# Allegro board IoT Moudle V1_0_3.brd
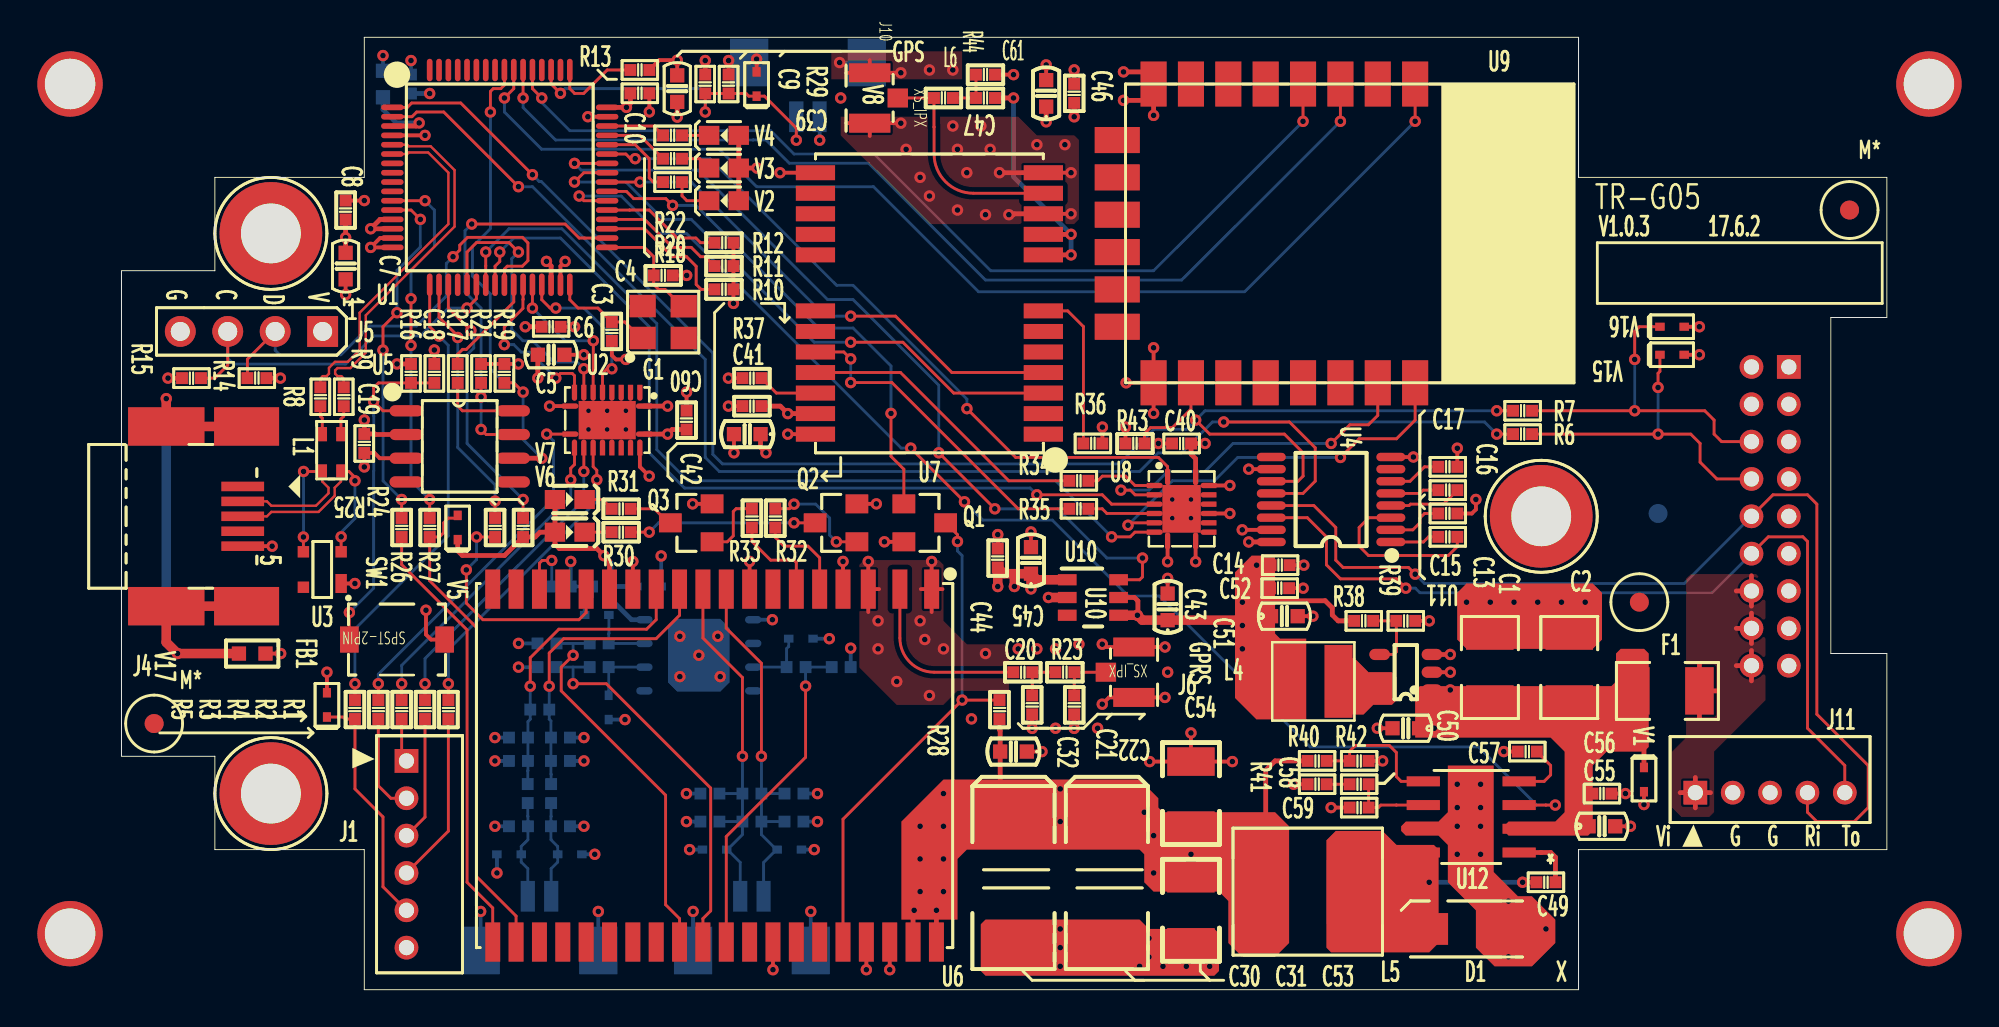
[diagram p0: board, top side]
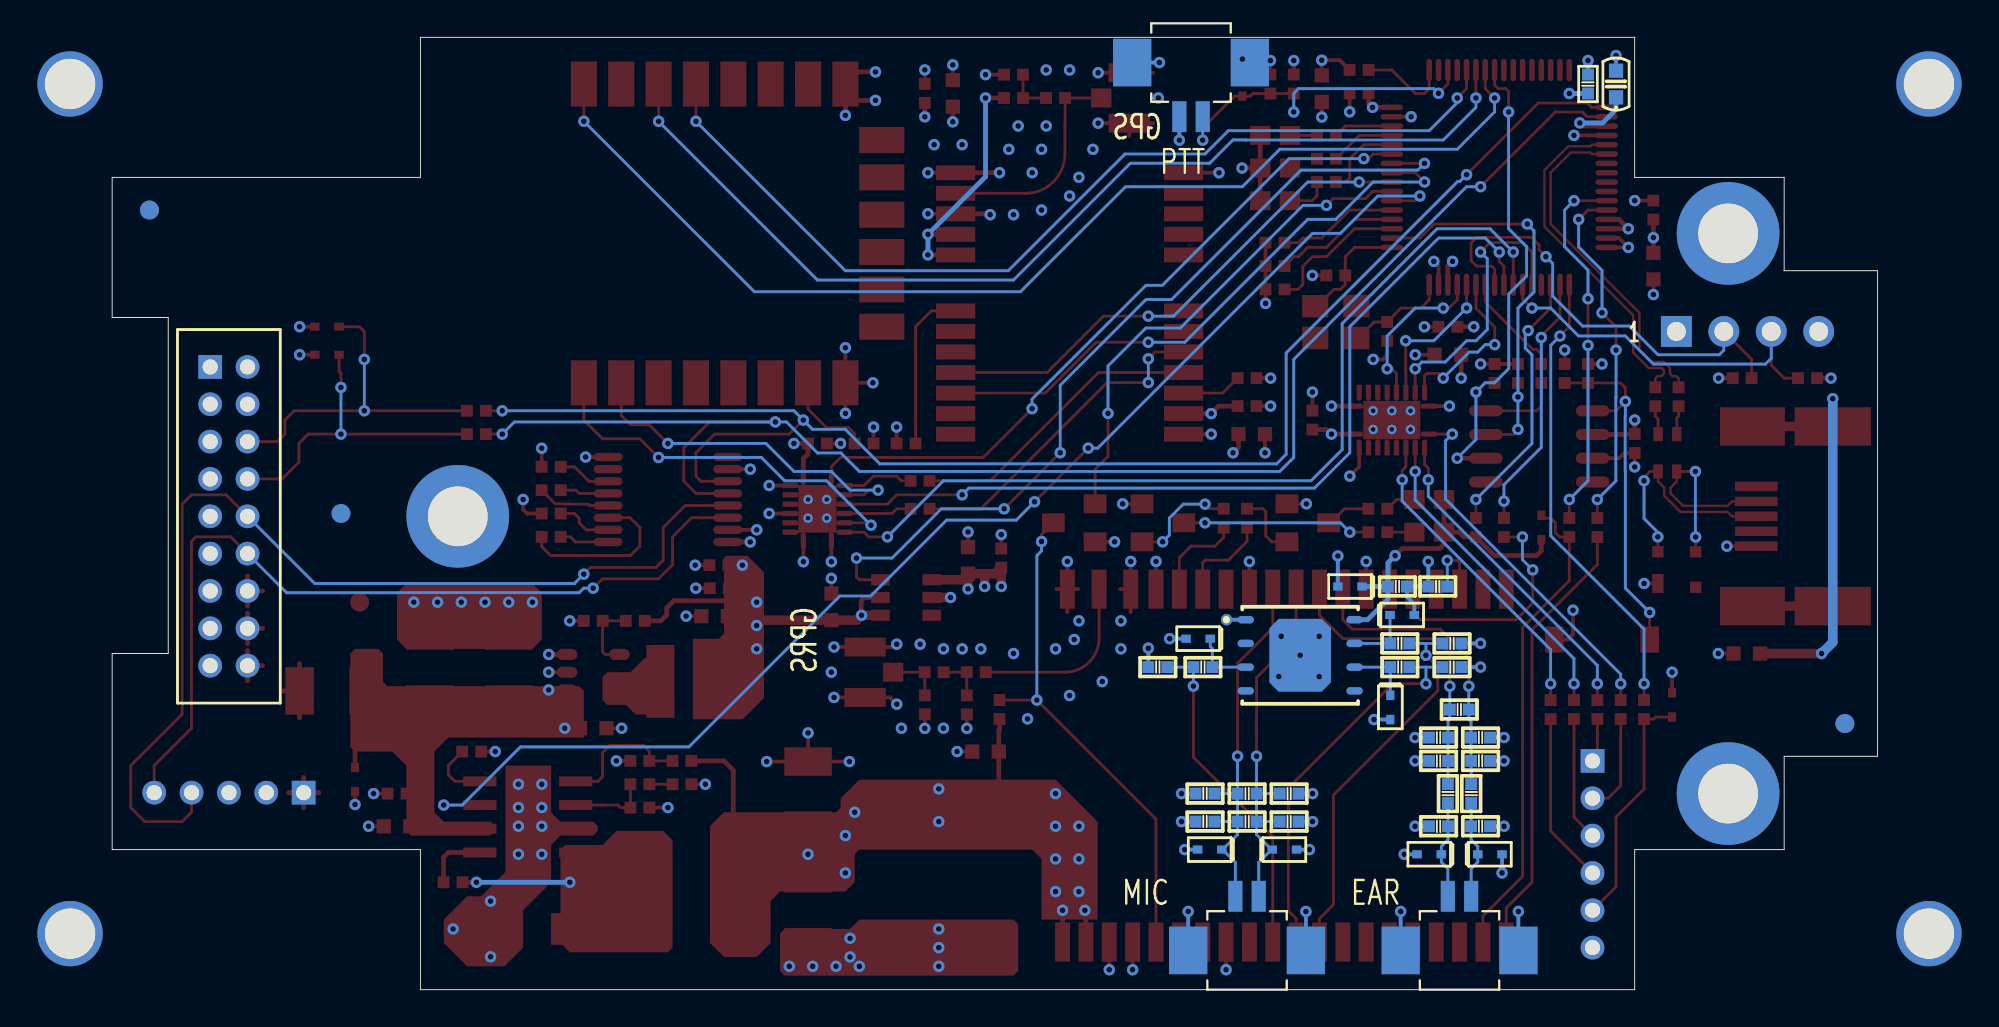
[diagram p1: board, bottom side, seen from below]

Outline 94.5 x 51 mm; copper layers: TOP, GND, VCC, BOTTOM. Coordinates in mm from the lower left corner of the outline.
Outline path: 0,38.5 0,12.5 5,12.5 5,7.5 13,7.5 13,0 78,0 78,7.5 94.5,7.5 94.5,18 91.5,18 91.5,36 94.5,36 94.5,43.5 78,43.5 78,51 13,51 13,43.5 5,43.5 5,38.5 0,38.5

## Design rules (mm)
constraint set DEFAULT: min track width 0.152
net group GPS_RXD: nets GPS_RXD N21119
net group GPS_TXD: nets GPS_TXD N21123
net group GSM_RESETB: nets GSM_RESETB N09232
net group HOST_TXD: nets HOST_TXD UART1_RX
net group J_LED1: nets J_LED1 R_LED1
net group J_LED2: nets J_LED2 R_LED2
net group J_LED3: nets J_LED3 R_LED3
net group J_LED4: nets J_LED4 R_LED4
net group J_PWR_OFF: nets J_PWR_OFF PWR_OFF
net group LED5: nets LED5 N16763366
net group LED6: nets LED6 N33466
net group LED7: nets LED7 N33798
net group MIC_N: nets MIC_N MIC_P
net group N06381: nets N06381 N06389
net group N06450: nets N06450 N06464
net group N18758: nets N18758 N18894
net group N18762: nets N18762 N18890
net group N56569: nets N56569 N56581
net group N57275: nets N57275 N57283
net group NET_LIGHT: nets N18359 NET_LIGHT
net group PWR_STATUS: nets N18352 PWR_STATUS
net group UART1_TX: nets HOST_RXD UART1_TX
net group UART2_RX: nets N09470 UART2_RX
net group UART2_TX: nets N09480 UART2_TX
net group USB_DM: nets N36326 USB_DM
net group USB_DP: nets N36338 USB_DP
net group USB_IN: nets N37457 N37463
net group WDO_B: nets N24334 WDO_B
net group EAR_N: nets EAR_N EAR_P N14884 N14898
net group N10748: nets N10748 N10820 N10896
nets with their own width: min track width 0.152; nets WD_IN
nets with their own width: min track width 0.203; nets GND
nets with their own width: min track width 0.254; nets VCC_2V8 VCC_3V3 VCC_4V VCC_5V VCC_IN

## Placement (name value [footprint] x y rotation side)
C1  476  [C1210]  73.25 17.25 90 top
C2  476  [C1210]  77.5 17.25 90 top
C3  220  [C0402]  26.25 35.25 270 top
C4  220  [C0402]  29 38.25 0 top
C5  106  [C0603]  23 34 0 top
C6  104  [C0402]  23 35.5 0 top
C7  106  [C0603]  12 38.75 270 top
C8  104  [C0402]  12 41.75 90 top
C9  106  [C0603]  29.75 48.25 90 top
C10  104  [C0402]  27.75 48 0 top
C11  106  [C0603]  14 48.5 90 bottom
C12  104  [C0402]  15.5 48.5 90 bottom
C13  104  [C0402]  71 24.25 180 top
C14  104  [C0402]  62.02 22.73 0 top
C15  104  [C0402]  71 25.5 0 top
C16  104  [C0402]  71 26.75 0 top
C17  104  [C0402]  71 28 0 top
C18  104  [C0402]  16.75 33 270 top
C19  104  [C0402]  13 29.25 270 top
C20  270  [C0402]  48.25 17 180 top
C21  270  [C0402]  48.75 15.25 270 top
C22  270  [C0402]  51 15.25 270 top
C23  120  [C0402]  31.5 10.5 0 bottom
C24  120  [C0402]  36 10.5 180 bottom
C25  330  [C0402]  31.5 9 0 bottom
C26  330  [C0402]  36 9 180 bottom
C27  120  [C0402]  33.75 10.5 0 bottom
C28  330  [C0402]  33.75 9 0 bottom
C29  120  [C0402]  22.39 15 0 bottom
C30  477  [CT7343]  47.75 6 270 top
C31  477  [CT7343]  52.75 6 270 top
C32  105  [C0603]  47.75 12.75 180 top
C33  330  [C0402]  21.25 13.5 180 bottom
C34  330  [C0402]  23.5 13.5 0 bottom
C35  120  [C0402]  23.5 12.25 0 bottom
C36  120  [C0402]  21.25 12.25 180 bottom
C37  330  [C0402]  23.5 8.75 0 bottom
C38  330  [C0402]  21.25 8.75 180 bottom
C39  104  [C0402]  32.5 48.5 90 top
C40  104  [C0402]  56.75 29.25 180 top
C41  104  [C0402]  33.75 31.25 180 top
C42  106  [C0603]  33.5 29.75 180 top
C43  105  [C0603]  56 20.5 90 top
C44  105  [C0603]  48.69 22.99 90 top
C45  103  [C0402]  46.91 23.11 90 top
C46  104  [C0402]  51 48 90 top
C47  106  [C0603]  49.5 48 90 top
C49  104  [C0402]  76.25 5.75 180 top
C50  106  [C0603]  68.75 14 180 top
C51  106  [C0603]  62.25 20 0 top
C52  104  [C0402]  62 21.5 0 top
C53  476  [C1210]  57.25 4.25 270 top
C54  476  [C1210]  57.25 10.5 90 top
C55  106  [C0603]  79.25 8.75 0 top
C56  104  [C0402]  79.25 10.5 0 top
C57  104  [C0402]  75.25 12.75 180 top
C58  472  [C0402]  66.25 11 180 top
C59  390  [C0402]  66.25 9.75 180 top
C60  104  [C0402]  30.25 30.5 90 top
C61  104  [C0402]  46.25 49 0 top
C62  104  [C0402]  25.7 21.59 180 bottom
C63  220  [C0402]  38.53 17.27 180 bottom
C64  220  [C0402]  22.78 17.27 0 bottom
C65  220  [C0402]  22.78 18.54 0 bottom
D1  B340A  [SMA]  72 3.25 0 top
D22  ESD  [SOD-523]  28.24 21.59 0 bottom
D23  ESD  [SOD-523]  36.37 18.8 0 bottom
D24  ESD  [SOD-523]  26.08 15.11 270 bottom
D25  ESD  [SOD-523]  25.45 20.07 180 bottom
F1  SMD200  [F1210]  82.75 16 180 top
FB1  BLM18AG331SN1D  [L0603]  7 18 0 top
G1  8MHz  [OSC_3225]  29 35.75 0 top
J1  CON6  [CON1X6_2R0_HDR_SIP]  15.26 7.25 0 top
J3  CON2X9  [CON2X9-2R0-5R5X20]  89.25 33.35 180 bottom
J4  MINI_USB  [CONN_USB_MINI_B_SMD]  2.75 25.35 270 top
J5  CON4  [CON1X4_2R54-DIP]  10.77 35.25 180 top
J6  XS_IPX  [IPX]  54.2 17 180 top
J7  -  [53261-0271]  33.75 5 180 bottom
J8  -  [53261-0271]  22.38 5 180 bottom
J9  -  [53261-0271]  36.75 46.75 0 bottom
J10  XS_IPX  [IPX]  40.06 47.75 0 top
J11  CON5  [CON1X5_2R0_HDR_SIP]  88.25 10.55 90 top
L1  DLW21HN900SQ2L  [L0805_4PIN]  11.25 28.75 90 top
L2  6.8nH  [L0402]  23 10.5 270 bottom
L3  6.8nH  [L0402]  21.75 10.5 270 bottom
L4  2.2uH  [L3310]  63.8 16.51 180 top
L5  6.8uH  [L2525]  63.5 5.25 180 top
L6  27nH  [L0402]  44 47.75 0 top
NOREF  -  []  5 12.5 0 top
NOREF#2  -  []  78 0 0 top
NOREF#3  -  []  13 7.5 0 top
NOREF#4  -  [unnamed#2]  76 25.35 0 top
NOREF#5  -  []  91.5 18 0 top
NOREF#6  -  []  94.5 7.5 0 top
NOREF#7  -  []  94.5 36 0 top
NOREF#8  -  []  76 25.35 0 top
NOREF#9  -  []  5 38.5 0 top
NOREF#10  -  [unnamed#2]  92.5 41.75 0 top
NOREF#11  -  []  78 0 0 top
NOREF#12  -  []  13 43.5 0 top
NOREF#13  -  []  99.58 51 0 top
NOREF#14  -  []  -5.08 51 0 top
NOREF#15  -  []  8 10.5 0 top
NOREF#16  -  []  5 38.5 0 top
NOREF#17  -  []  13 7.5 0 top
NOREF#18  -  []  91.5 18 0 top
NOREF#19  -  []  13 43.5 0 top
NOREF#20  -  []  78 43.5 0 top
NOREF#21  -  [unnamed#2]  8 10.5 0 top
NOREF#22  -  []  8 40.5 0 top
NOREF#23  -  []  8 10.5 0 top
NOREF#24  -  [unnamed#2]  81.25 20.75 0 top
NOREF#25  -  []  -5.5 0 90 top
NOREF#26  -  []  94.5 36 0 top
NOREF#27  -  []  99.58 51 0 top
NOREF#28  -  [unnamed#2]  1.75 14.25 0 top
NOREF#29  -  [unnamed#2]  8 40.5 0 top
NOREF#30  -  []  94.5 7.5 0 top
NOREF#31  -  []  78 43.5 0 top
NOREF#32  -  []  5 12.5 0 top
NOREF#33  -  []  76 25.35 0 top
NOREF#34  -  []  -5.08 51 0 top
NOREF#35  -  []  8 40.5 0 top
NOREF#36  -  [unnamed#2]  92.5 41.75 180 bottom
NOREF#37  -  [unnamed#2]  96.75 3 180 bottom
NOREF#38  -  [unnamed#2]  1.75 14.25 180 bottom
NOREF#39  -  [unnamed#2]  -2.75 48.5 180 bottom
NOREF#40  -  [unnamed#2]  82.25 25.5 180 bottom
NOREF#41  -  [unnamed#2]  -2.75 3 180 bottom
NOREF#42  -  [unnamed#2]  96.75 48.5 180 bottom
Q1  DTC114TET1G  [SOT-23]  43 25 270 top
Q2  DTC114TET1G  [SOT-23]  38.25 25 90 top
Q3  DTC114TET1G  [SOT-23]  30.5 25 90 top
R1  102  [R0402]  17.5 15 270 top
R2  102  [R0402]  16.25 15 270 top
R3  102  [R0402]  13.75 15 270 top
R4  102  [R0402]  15 15 270 top
R5  102  [R0402]  12.5 15 90 top
R6  0  [R0402]  75 29.75 0 top
R7  101  [R0402]  75 31 0 top
R8  220  [R0402]  10.65 31.75 270 top
R9  220  [R0402]  11.9 31.75 270 top
R10  101  [R0402]  32.25 37.5 0 top
R11  101  [R0402]  32.25 38.75 0 top
R12  101  [R0402]  32.25 40 0 top
R13  101  [R0402]  27.75 49.25 0 top
R14  472  [R0402]  7.25 32.75 0 top
R15  472  [R0402]  3.75 32.75 180 top
R16  1002  [R0402]  15.5 33 270 top
R17  101  [R0402]  18 33 90 top
R18  102  [R0402]  29.5 43.25 180 top
R19  1002  [R0402]  20.5 33 90 top
R20  102  [R0402]  29.5 44.5 0 top
R21  1002  [R0402]  19.25 33 90 top
R22  102  [R0402]  29.5 45.75 0 top
R23  0  [R0402]  50.5 17 0 top
R24  102  [R0402]  21.5 24.75 270 top
R25  101  [R0402]  20 24.75 270 top
R26  101  [R0402]  15 24.75 270 top
R27  101  [R0402]  16.5 24.75 270 top
R28  102  [R0402]  47 15 270 top
R29  102  [R0402]  31.25 48.5 90 top
R30  102  [R0402]  26.75 24.5 180 top
R31  102  [R0402]  26.75 25.75 180 top
R32  102  [R0402]  35 25.25 270 top
R33  102  [R0402]  33.75 25.25 270 top
R34  0  [R0402]  51.25 27.25 0 top
R35  0  [R0402]  51.25 25.75 0 top
R36  0  [R0402]  52 29.25 0 top
R37  0  [R0402]  33.75 32.75 180 top
R38  5623  [R0402]  66.5 19.75 0 top
R39  1003  [R0402]  68.75 19.75 180 top
R40  1002  [R0402]  64 12.25 180 top
R41  4992  [R0402]  64 11 0 top
R42  2491  [R0402]  66.25 12.25 180 top
R43  1002  [R0402]  54.25 29.25 0 top
R44  100  [R0402]  46.25 47.75 0 top
R45  51R  [R0402]  25.57 18.54 180 bottom
R46  51R  [R0402]  36.11 17.27 180 bottom
R47  51R  [R0402]  25.57 17.27 180 bottom
R48  102  [R0402]  23.54 21.59 0 bottom
SW1  SPST-2PIN  [SW_SPST_SMT_4X3X2]  14.75 18.75 180 top
U1  MKL26Z256VLH4  [LQFP64-10X10]  20.25 43.5 0 top
U2  SN74LVC245A  [PVQFN20_4R5X3R5_PAD2R05X3R05]  26 30.5 180 top
U3  PRTR5V0U2X  [SOT-143B]  10.75 22.5 90 top
U4  MAX3232EUE  [SOP16-0R65-6R4]  64.75 26.25 180 top
U5  SP706TEN  [SO8N_6R0_1R27]  15.25 31 0 top
U6  -  [A8500]  31.75 12 270 top
U7  NEO-6Q  [NEO-6]  43.25 36.75 180 top
U8  SN74CBTLV3257RGY  [PVQFN16_4X3R5_PAD2R05X2R55]  56.75 25.75 270 top
U9  -  [ESP-12F]  65.75 40.5 270 top
U10  TPS22860DBVR  [DBV0006A_N]  52 21 0 top
U11  LM3671MF  [SOT23-5]  68.75 17 180 top
U12  TPS54331DDAR  [DDA8_3X2P13]  72.25 9.25 180 top
U13  SIM_QFN5X6-8  [SON8_5X6_PAD]  30.91 17.91 180 bottom
V1  RB520S30T  [SOD-523]  81.5 11.25 270 top
V2  V_LED  [V0603]  32.25 42.25 0 top
V3  V_LED  [V0603]  32.25 44 0 top
V4  V_LED  [V0603]  32.25 45.75 0 top
V5  RB520S30T  [SOD-523]  18 24.75 90 top
V6  V_LED  [V0603]  24 24.5 180 top
V7  V_LED  [V0603]  24 26.25 180 top
V8  ESD5Z5.0T1  [SOD-523]  34 48.5 90 top
V11  ESD5Z5.0T1  [SOD-523]  24 7.25 0 bottom
V12  ESD5Z5.0T1  [SOD-523]  20.75 7.25 180 bottom
V13  ESD5Z5.0T1  [SOD-523]  31.75 7.5 180 bottom
V14  ESD5Z5.0T1  [SOD-523]  35.75 7.5 0 bottom
V15  ESD5Z5.0T1  [SOD-523]  83 34 0 top
V16  ESD5Z5.0T1  [SOD-523]  83 35.5 0 top
V17  ESD5Z5.0T1  [SOD-523]  11 15.25 90 top

## Library data of the parts
C1 C2 C53 C54 = CAP_NP: signal model: DEFAULT_CAPACITOR_4.76e+014pF_2_1
C3 C4 = CAP_NP: signal model: DEFAULT_CAPACITOR_2.2e+014pF_2_1
C5 C7 C9 C11 C42 C47 C50 C51 C55 = CAP_NP: signal model: DEFAULT_CAPACITOR_1.06e+014pF_2_1
C6 C8 C10 C12-C19 C39-C41 C46 C49 C52 C56 C57 C60 = CAP_NP: signal model: DEFAULT_CAPACITOR_1.04e+014pF_2_1
C20-C22 = CAP_NP: signal model: DEFAULT_CAPACITOR_2.7e+014pF_2_1
C23 C24 C27 C29 C35 C36 = CAP_NP: signal model: DEFAULT_CAPACITOR_1.2e+014pF_2_1
C25 C26 C28 C33 C34 C37 C38 = CAP_NP: signal model: DEFAULT_CAPACITOR_3.3e+014pF_2_1
C30 C31 = CAP_POL: signal model: DEFAULT_CAPACITOR_4.77e+014pF_2_1
C32 C43 C44 = CAP_NP: signal model: DEFAULT_CAPACITOR_1.05e+014pF_2_1
C45 = CAP_NP: signal model: DEFAULT_CAPACITOR_1.03e+014pF_2_1
C58 = CAP_NP: signal model: DEFAULT_CAPACITOR_4.72e+014pF_2_1
C59 = CAP_NP: signal model: DEFAULT_CAPACITOR_3.9e+014pF_2_1
C61-C65 = CAP_NP
D1 V1 V5 = V_DIODE
D22-D25 = DIODE BREAKDOWN
F1 = F_FUSE
FB1 R43-R48 = R2
G1 = G_OSC_4PINpassive
J1 = XS_CON6
J3 = XS_CON2X9
J4 = XS_MINI_USB
J5 = XS_CON4
J6 J10 = XS_IPX
J7-J9 = CON4_0
J11 = XS_CON5
L1 = DLW21HN900SQ2L
L2 L3 = L: signal model: DEFAULT_INDUCTOR_6.800000nH_2_1
L4 = L: signal model: DEFAULT_INDUCTOR_4700nH_2_1
L5 = L: signal model: DEFAULT_INDUCTOR_6800nH_2_1
L6 = L
Q1-Q3 = NPN
R1-R5 R18 R20 R22 R24 R28-R33 = R2: signal model: DEFAULT_RESISTOR_102.000000OHM_2_1
R6 R7 R10-R13 R17 R25-R27 R34 R35 = R2: signal model: DEFAULT_RESISTOR_101.000000OHM_2_1
R8 R9 = R2: signal model: DEFAULT_RESISTOR_220.000000OHM_2_1
R14 R15 = R2: signal model: DEFAULT_RESISTOR_472.000000OHM_2_1
R16 R19 R21 R40 = R2: signal model: DEFAULT_RESISTOR_1002OHM_2_1
R23 R36 R37 = R2: signal model: DEFAULT_RESISTOR_0.001OHM_2_1
R38 = R2: signal model: DEFAULT_RESISTOR_5623OHM_2_1
R39 = R2: signal model: DEFAULT_RESISTOR_1003OHM_2_1
R41 = R2: signal model: DEFAULT_RESISTOR_4991OHM_2_1
R42 = R2: signal model: DEFAULT_RESISTOR_2491OHM_2_1
SW1 = S_PUSHBUTTON-SPST-2PIN
U1 = D_MKL26Z256VLH4
U2 = D_TRS_SN74LVC245ARGY
U3 = D_PRTR5V0U2X_0
U4 = D_TRS_MAX3232EUE
U5 = D_SP706TEN
U6 = D_A8500
U7 = D_NEO-6
U8 = D_SN74CBTLV3257RGY_0
U9 = D_ESP_12F
U10 = N_TPS22860DBVR
U11 = N_PWR_ADP122_1
U12 = N_PWR_TPS54331DDA
U13 = SIM_QFN5X6-8
V2-V4 V6 V7 = V_LED
V8 V11-V17 = V_DIODE ZENER

## Footprints (pads in the part's own frame, mm; a bottom-side part is the same pattern mirrored in y, then rotated)
53261-0271
  rect 2.05x2.55 smd: 1(-3.15,-2.9) 4(3.15,-2.9)
  rect 0.76x1.651 smd: 2(-0.625,0) 3(0.625,0)
A8500
  rect 2.1x0.8 smd: 1(-9.45,11.62) 2(-9.45,9.92) 3(-9.45,8.228) 4(-9.45,6.875) 5(-9.45,5.625) 6(-9.45,4.375) 7(-9.45,3.125) 8(-9.45,1.875) 9(-9.45,0.625) 10(-9.45,-0.625) 11(-9.45,-1.875) 12(-9.45,-3.125) 13(-9.45,-4.375) 14(-9.45,-5.625) 15(-9.45,-6.875) 16(-9.45,-8.125) 17(-9.45,-9.375) 18(-9.45,-10.625) 19(-9.45,-11.875) 20(9.45,-11.875) 21(9.45,-10.625) 22(9.45,-9.375) 23(9.45,-8.125) 24(9.45,-6.875) 25(9.45,-5.625) 26(9.45,-4.375) 27(9.45,-3.125) 28(9.45,-1.875) 29(9.45,-0.625) 30(9.45,0.625) 31(9.45,1.875) 32(9.45,3.125) 33(9.45,4.375) 34(9.45,5.625) 35(9.45,6.875) 36(9.45,8.125) 37(9.45,9.375) 38(9.45,10.625) 39(9.45,11.875)
C0402
  rect 0.635x0.635 smd: 1(-0.508,0) 2(0.508,0)
C0603
  rect 0.762x0.762 smd: 1(-0.711,0) 2(0.711,0)
C1210
  rect 1.524x2.54 smd: 1(-1.714,0) 2(1.714,0)
CON1X4_2R54-DIP
  rect 1.651x1.651 hole 1.016: 1(0,0)
  round 1.651 hole 1.016: 2(2.54,0) 3(5.08,0) 4(7.62,0)
CON1X5_2R0_HDR_SIP
  rect 1.27x1.27 hole 0.813: 1(0,4)
  round 1.27 hole 0.813: 2(0,2) 3(0,0) 4(0,-2) 5(0,-4)
CON1X6_2R0_HDR_SIP
  rect 1.27x1.27 hole 0.813: 1(0,5)
  round 1.27 hole 0.813: 2(0,3) 3(0,1) 4(0,-1) 5(0,-3) 6(0,-5)
CON2X9-2R0-5R5X20
  rect 1.27x1.27 hole 0.813: 1(0,0)
  round 1.27 hole 0.813: 2(0,-1.999) 3(0,-4) 4(0,-6) 5(0,-8.001) 6(0,-10) 7(0,-11.999) 8(0,-14.001) 9(0,-16) 10(1.999,-16) 11(1.999,-14.001) 12(1.999,-11.999) 13(1.999,-10) 14(1.999,-8.001) 15(1.999,-6) 16(1.999,-4) 17(1.999,-1.999) 18(1.999,0)
CONN_USB_MINI_B_SMD
  rect 0.508x2.286 smd: 1(-1.6,3.742) 2(-0.8,3.742) 3(0,3.742) 4(0.8,3.742) 5(1.6,3.742)
  rect 2.057x3.479 smd: 6(4.812,3.949) 8(-4.812,3.949)
  rect 2.057x4.089 smd: 7(4.812,-0.351) 9(-4.812,-0.351)
CT7343
  rect 2.007x2.489 smd: 1(-3.65,0) 2(3.65,0)
DBV0006A_N
  rect 1x0.6 smd: 1(-1.375,0.95) 2(-1.375,0) 3(-1.375,-0.95) 4(1.375,-0.95) 5(1.375,0) 6(1.375,0.95)
DDA8_3X2P13
  rect 1.778x0.533 smd: 1(-2.565,1.905) 2(-2.565,0.635) 3(-2.565,-0.635) 4(-2.565,-1.905) 5(2.565,-1.905) 6(2.565,-0.635) 7(2.565,0.635) 8(2.565,1.905)
  rect 2.134x2.286 smd: EPAD(0,0)
ESP-12F
  rect 2.413x1.397 smd: 1(-8,3.5) 2(-8,1.5) 3(-8,-0.5) 4(-8,-2.5) 5(-8,-4.5) 6(-8,-6.5) 7(-8,-8.5) 8(-8,-10.5) 15(8,-10.5) 16(8,-8.5) 17(8,-6.5) 18(8,-4.5) 19(8,-2.5) 20(8,-0.5) 21(8,1.5) 22(8,3.5)
  rect 1.397x2.413 smd: 9(-5,-12.445) 10(-3,-12.445) 11(-1,-12.445) 12(1,-12.445) 13(3,-12.445) 14(5,-12.445)
F1210
  rect 1.524x2.54 smd: 1(-1.714,0) 2(1.714,0)
IPX
  rect 2.21x1.016 smd: 1(0,1.35) 2(0,-1.35)
  rect 1.092x1.016 smd: 3(1.5,0)
L0402
  rect 0.635x0.635 smd: 1(-0.508,0) 2(0.508,0)
L0603
  rect 0.762x0.762 smd: 1(-0.711,0) 2(0.711,0)
L0805_4PIN
  rect 0.762x0.508 smd: 1(-1,-0.5) 2(1,-0.5) 3(1,0.5) 4(-1,0.5)
L2525
  rect 3x3.429 smd: 1(-2.52,0) 2(2.52,0)
L3310
  rect 1.5x3.9 smd: 1(-1.35,0) 2(1.35,0)
LQFP64-10X10
  oval 1.2x0.3 smd: 1(-5.75,3.75) 2(-5.75,3.25) 3(-5.75,2.75) 4(-5.75,2.25) 5(-5.75,1.75) 6(-5.75,1.25) 7(-5.75,0.75) 8(-5.75,0.25) 9(-5.75,-0.25) 10(-5.75,-0.75) 11(-5.75,-1.25) 12(-5.75,-1.75) 13(-5.75,-2.25) 14(-5.75,-2.75) 15(-5.75,-3.25) 16(-5.75,-3.75) 33(5.75,-3.75) 34(5.75,-3.25) 35(5.75,-2.75) 36(5.75,-2.25) 37(5.75,-1.75) 38(5.75,-1.25) 39(5.75,-0.75) 40(5.75,-0.25) 41(5.75,0.25) 42(5.75,0.75) 43(5.75,1.25) 44(5.75,1.75) 45(5.75,2.25) 46(5.75,2.75) 47(5.75,3.25) 48(5.75,3.75)
  oval 0.3x1.2 smd: 17(-3.75,-5.75) 18(-3.25,-5.75) 19(-2.75,-5.75) 20(-2.25,-5.75) 21(-1.75,-5.75) 22(-1.25,-5.75) 23(-0.75,-5.75) 24(-0.25,-5.75) 25(0.25,-5.75) 26(0.75,-5.75) 27(1.25,-5.75) 28(1.75,-5.75) 29(2.25,-5.75) 30(2.75,-5.75) 31(3.25,-5.75) 32(3.75,-5.75) 49(3.75,5.75) 50(3.25,5.75) 51(2.75,5.75) 52(2.25,5.75) 53(1.75,5.75) 54(1.25,5.75) 55(0.75,5.75) 56(0.25,5.75) 57(-0.25,5.75) 58(-0.75,5.75) 59(-1.25,5.75) 60(-1.75,5.75) 61(-2.25,5.75) 62(-2.75,5.75) 63(-3.25,5.75) 64(-3.75,5.75)
NEO-6
  rect 2.1x0.8 smd: 1(-6.1,7) 2(-6.1,5.9) 3(-6.1,4.8) 4(-6.1,3.7) 5(-6.1,2.6) 6(-6.1,1.5) 7(-6.1,0.4) 8(-6.1,-2.6) 9(-6.1,-3.7) 10(-6.1,-4.8) 11(-6.1,-5.9) 12(-6.1,-7) 13(6.1,-7) 14(6.1,-5.9) 15(6.1,-4.8) 16(6.1,-3.7) 17(6.1,-2.6) 18(6.1,0.4) 19(6.1,1.5) 20(6.1,2.6) 21(6.1,3.7) 22(6.1,4.8) 23(6.1,5.9) 24(6.1,7)
OSC_3225
  rect 1.4x1.2 smd: 1(-1.1,-0.85) 2(1.1,-0.85) 3(1.1,0.85) 4(-1.1,0.86)
PVQFN16_4X3R5_PAD2R05X2R55
  custom 0.85x0.28 smd: 1(-1.69,-0.75) 8(1.69,-0.75) 9(1.69,0.75) 16(-1.69,0.75)
  custom 0.28x0.85 smd: 2(-1.25,-1.44) 3(-0.75,-1.44) 4(-0.25,-1.44) 5(0.25,-1.44) 6(0.75,-1.44) 7(1.25,-1.44) 10(1.25,1.44) 11(0.75,1.44) 12(0.25,1.44) 13(-0.25,1.44) 14(-0.75,1.44) 15(-1.25,1.44)
  rect 2.55x2.05 smd: 17(0,0)
PVQFN20_4R5X3R5_PAD2R05X3R05
  custom 0.85x0.28 smd: 1(-1.965,-0.75) 10(1.965,-0.75) 11(1.965,0.75) 20(-1.965,0.75)
  custom 0.28x0.85 smd: 2(-1.75,-1.465) 3(-1.25,-1.465) 4(-0.75,-1.465) 5(-0.25,-1.465) 6(0.25,-1.465) 7(0.75,-1.465) 8(1.25,-1.465) 9(1.75,-1.465) 12(1.75,1.465) 13(1.25,1.465) 14(0.75,1.465) 15(0.25,1.465) 16(-0.25,1.465) 17(-0.75,1.465) 18(-1.25,1.465) 19(-1.75,1.465)
  rect 3.05x2.05 smd: 21(0,0)
R0402
  rect 0.635x0.635 smd: 1(-0.508,0) 2(0.508,0)
SMA
  rect 2.5x1.7 smd: 1(-2.24,0) 2(2.24,0)
SO8N_6R0_1R27
  oval 1.8x0.6 smd: 1(0,0) 2(0,-1.27) 3(0,-2.54) 4(0,-3.81) 5(5.715,-3.81) 6(5.715,-2.54) 7(5.715,-1.27) 8(5.715,0)
SOD-523
  rect 0.508x0.432 smd: 1(-0.65,0) 2(0.65,0)
SON8_5X6_PAD
  oval 0.875x0.4 smd: 1(-2.912,1.905) 2(-2.912,0.635) 3(-2.912,-0.635) 4(-2.912,-1.905) 5(2.912,-1.905) 6(2.912,-0.635) 7(2.912,0.635) 8(2.912,1.905)
  rrect 3.3x3.9 smd: 9(0,0)
SOP16-0R65-6R4
  oval 1.549x0.45 smd: 1(-3.2,2.275) 2(-3.2,1.625) 3(-3.2,0.975) 4(-3.2,0.325) 5(-3.2,-0.325) 6(-3.2,-0.975) 7(-3.2,-1.625) 8(-3.2,-2.275) 9(3.2,-2.275) 10(3.2,-1.625) 11(3.2,-0.975) 12(3.2,-0.325) 13(3.2,0.325) 14(3.2,0.975) 15(3.2,1.625) 16(3.2,2.275)
SOT23-5
  oval 1.1x0.6 smd: 1(-1.4,0.95) 2(-1.4,0) 3(-1.4,-0.95) 4(1.4,-0.95) 5(1.4,0.95)
SOT-23
  rect 1.016x1.219 smd: 1(-1.016,-1.118) 2(1.016,-1.118) 3(0,1.118)
SOT-143B
  rect 1.016x0.61 smd: 1(-0.75,-1.01)
  rect 0.61x0.61 smd: 2(0.95,-1.01) 3(0.95,1.01) 4(-0.95,1.01)
SW_SPST_SMT_4X3X2
  rect 1x1.4 smd: 1(-2.55,0) 2(2.55,0)
unnamed#2
  round 5.5 hole 3.2: 1(0,0)
V0603
  rect 1.092x1.016 smd: 1(-0.794,0) 2(0.794,0)

## Nets
GND: C1.2 C2.2 C3.2 C4.2 C5.2 C6.2 C7.2 C8.2 C9.2 C10.2 C11.2 C12.2 C14.2 C15.2 C17.2 C18.1 C19.2 C21.2 C22.2 C23.1 C24.1 C25.1 C26.1 C30.2 C31.2 C32.1 C33.2 C34.2 C35.2 C36.2 C37.2 C38.2 C39.2 C40.2 C41.2 C42.2 C43.2 C44.2 C45.2 C46.2 C47.2 C50.2 C51.2 C52.2 C53.2 C54.2 C55.2 C56.2 C57.2 C59.2 C60.2 C61.2 C62.2 C63.1 C64.1 C65.1 D1.2 D22.2 D23.2 D24.2 D25.2 FB1.2 J1.6 J3.7 J3.8 J3.9 J4.5 J5.4 J6.1 J6.2 J7.1 J7.4 J8.1 J8.4 J9.1 J9.3 J9.4 J10.1 J10.2 J11.2 J11.3 Q1.2(EMITTER) Q2.2(EMITTER) Q3.2(EMITTER) R10.2 R11.2 R12.2 R13.2 R19.2 R21.2 R36.2 R37.2 R39.1 R41.1 R42.1 R43.1 R48.2 SW1.1 U1.4 U1.15 U1.16(VSSA) U1.31 U1.47 U2.10 U2.19 U2.21 U3.1 U4.8 U4.10 U4.15 U5.3 U6.1 U6.3 U6.4 U6.8 U6.13 U6.32 U6.36 U6.37 U7.10 U7.12 U7.13 U7.24 U8.8 U8.9 U8.12 U8.15(\\O\E) U8.17 U9.15 U10.2 U11.2 U12.7 U12.EPAD U13.1 U13.9(PAD) V1.2 V8.2 V11.2 V12.2 V13.2 V14.2 V15.2 V16.2 V17.2
VCC_2V8: C62.1 D22.1(CATHODE) R24.2 U6.14 U13.8 V5.1(K) V6.2 V7.2
VCC_3V3: C5.1 C6.1 C7.1 C8.1 C9.1 C10.1 C11.1 C12.1 C14.1 C19.1 C40.1 C43.1 C46.1 C47.1 C51.1 C52.1 C60.1 J5.1 L4.2 R14.2 R15.2 R16.1 R29.2 R38.1 U1.3 U1.13 U1.14 U1.30 U1.48 U2.1 U2.20(VCC) U4.16(VCC) U5.2 U8.16 U9.8(VCC) U10.4 U10.5 V2.2 V3.2 V4.2
VCC_4V: C30.1 C31.1 C32.2 C53.1 C54.1 L5.2 R28.2 R40.2 U6.38 U6.39
VCC_5V: C1.1 C2.1 C50.1 C55.1 C56.1 F1.2 U11.1(VIN) U11.3 U12.2 V1.1(K)
VCC_GPS_3V3: C41.1 C42.1 C44.1 C45.1 U7.23 U10.1(VOUT)
VCC_IN: F1.1 J3.10 J3.11 J3.12 J11.1
BT_ASSEMBLY: R12.1 U1.37
EAR_N: C38.1 J8.3 L3.2 V12.1(CATHODE)
EAR_P: C37.1 J8.2 L2.2 V11.1(CATHODE)
GPS_ASSEMBLY: R11.1 U1.36
GPS_PWR_EN: U1.42 U10.6
GPS_RXD: R34.2 U8.2
GPS_TIMEPULSE: U1.41 U7.3
GPS_TXD: R35.2 U8.5
GPS_WAKE_UP: U1.40 U7.4
GPS_WIFI_SEL: U1.43 U8.1
GSM_ASSEMBLY: R10.1 U1.35
GSM_ON_IND: R24.1 U1.19
GSM_PWR_EN: U1.38 U12.3
GSM_PWRKEY: Q1.1 U1.39
GSM_RESETB: R25.1 U1.18
HOST_RXD: J3.16 R7.2 V16.1(CATHODE)
HOST_TXD: J3.15 R6.2 V15.1(CATHODE)
J_LED1: J1.1 R4.2
J_LED2: J1.2 R3.2
J_LED3: J1.3 R2.2
J_LED4: J1.4 R1.2
J_PWR_OFF: J1.5 R5.1 V17.1(CATHODE)
LED1: U1.21 U2.8
LED2: U1.27 U2.9
LED3: U1.28 U2.7
LED4: U1.29 U2.6
LED5: R18.2 U1.44
LED6: R20.1 U1.45
LED7: R22.1 U1.46
M_RST: C18.2 R16.2 SW1.2 U5.1
MCU_RESET: R21.1 U1.34 U5.7
MIC_N: C23.2 C25.2 C27.1 C28.1 J7.3 U6.10 V13.1(CATHODE)
MIC_P: C24.2 C26.2 C27.2 C28.2 J7.2 U6.9 V14.1(CATHODE)
NET_LIGHT: R33.2 U6.6
PTT: C39.1 J9.2 R29.1 U1.51 V8.1(CATHODE)
PWR_OFF: R5.2 U1.17
PWR_STATUS: R32.2 U6.5
PWRKEY_N: Q1.3 R28.1 U6.35
R_LED1: R4.1 U2.12
R_LED2: R3.1 U2.11
R_LED3: R2.1 U2.13
R_LED4: R1.1 U2.14
RXD_RS232: J3.14 J11.4 U4.13
SIM_C2: D25.1(CATHODE) R45.1 U13.7
SIM_C3: D24.1(CATHODE) R47.1 U13.6
SIM_C7: D23.1(CATHODE) R46.2 U13.3
SIM_CLK: C64.2 R47.2 U6.29
SIM_DATA: C63.2 R46.1 U6.30
SIM_RST: C65.2 R45.2 U6.28
SIM_VCC: U6.31
SWD_CLK: J5.3 R15.1 U1.22
SWD_DIO: J5.2 R14.1 U1.25
TXD_RS232: J3.13 J11.5 U4.14
UART0_RX: U1.23 U8.7
UART0_TX: U1.24 U8.4
UART1_RX: R6.1 U1.2 U4.12
UART1_TX: R7.1 U1.1 U4.11
UART2_RX: R26.1 U1.12
UART2_TX: R27.1 U1.11
USB_DM: R8.1 U1.6
USB_DP: R9.1 U1.5
WD_IN: R19.1 U1.56 U5.6
WDO_B: R17.2 U1.26
WIFI_ASSEMBLY: R13.1 U1.49
WIFI_EN: U1.54 U9.3
WIFI_RST: U1.55 U9.1
WIFI_RXD: U8.3 U9.21
WIFI_TXD: U8.6 U9.22
WIFI_WAKEUP: U1.53 U9.4
N01096: C3.1 G1.1 U1.32
N01100: C4.1 G1.3 U1.33
N06381: C13.2 U4.1
N06389: C13.1 U4.3
N06450: C16.1 U4.5
N06464: C16.2 U4.4
N06635: C17.1 U4.6
N06639: C15.1 U4.2
N09232: R25.2 U6.15
N09470: R26.2 U6.20
N09480: R27.2 U6.21 V5.2
N10748: C20.2 U6.2
N10820: C20.1 C21.1 R23.1
N10896: C22.1 J6.3 R23.2
N14884: C29.2 C34.1 C35.1 L2.1 U6.11
N14898: C29.1 C33.1 C36.1 L3.1 U6.12
N18352: Q2.1 R32.1
N18359: Q3.1 R33.1
N18758: Q2.3 R30.1
N18762: Q3.3 R31.1
N18890: R31.2 V7.1
N18894: R30.2 V6.1
N20713: J10.3 L6.1 U7.11
N20956: R36.1 U7.7
N20968: R37.1 U7.22(V_BCKP)
N21119: R34.1 U7.21
N21123: R35.1 U7.20
N24334: R17.1 U5.8(\\W\D\O)
N33466: R20.2 V3.1
N33798: R22.2 V4.1
N36026: FB1.1 J4.6 J4.7 J4.8 J4.9
N36326: L1.3 R8.2
N36338: L1.2 R9.2
N37457: J4.3 L1.1 U3.2
N37463: J4.2 L1.4 U3.3
N55761: C57.1 U12.4
N56569: C49.1 U12.1
N56581: C49.2 D1.1(K) L5.1 U12.8
N57170: R40.1 R42.2 U12.5(VSENSE)
N57275: C58.2 R41.2
N57283: C58.1 C59.1 U12.6
N61325: L4.1 U11.5
N62115: R38.2 R39.2 U11.4
N16753958: R44.2 U7.8 U7.9
N16763366: R18.1 V2.1
N16821872: R43.2 U9.16
N16822669: C61.1 L6.2 R44.1
N16857182: R48.1 U6.17

Pads without a net: G1 2 4; J3 1 2 3 4 5 6 17 18; J4 1 4; NOREF#4 1; NOREF#10 1; NOREF#21 1; NOREF#24 1; NOREF#28 1; NOREF#29 1; NOREF#36 1; NOREF#37 1; NOREF#38 1; NOREF#39 1; NOREF#40 1; NOREF#41 1; NOREF#42 1; U1 7 8 9 10 20 50 52 57 58 59 60 61 62 63 64; U2 2 3 4 5 15 16 17 18; U3 4; U4 7 9; U5 4 5; U6 7 16 18 19 22 23 24 25 26 27 33 34; U7 1 2 5 6 14 15 16 17 18 19; U8 10 11 13 14; U9 2 5 6 7 9 10 11 12 13 14 17 18 19 20; U10 3; U13 2 4 5

## Via types
v1: diameter 0.61, hole 0.305, TOP to BOTTOM, 354 vias
v2: diameter 0.508, hole 0.254, TOP to BOTTOM, 10 vias

## Routing (per net, layer and track width the routed paths; a pad name or vN(x,y) marks a point on that pad's centre or on a via; arc(x,y) is an arc through that point)
GND: length 189.7
  TOP w0.203: R42.1 v1(67.51,12.25) ; V1.2 v1(81.5,9.91) ; R43.1 v1(53.74,30.13) ; C46.2 v1(51,49.26) ; U9.15 v1(55.25,34.38) ; U9.15 v1(55.25,30.86) ; U9.15 v1(53.78,32.5) ; U1.16 v1(13.34,39.75) 13.84,40.25 U1.15 ; C54.2 v1(59.47,12.21) ; C54.2 v1(57.25,13.75) ; C54.2 v1(55.04,12.21) ; U1.31 23.5,38.75 v1(23.75,39) ; C3.2 26.25,33.97 26.47,33.75 v1(27,33.75) ; C9.2 v1(29.75,49.78) 28.78,49.78 R13.2 ; C32.1 v1(49.27,12.75) ; v1(32.76,36.75) R10.2 R11.2 R12.2 ; C40.2 v1(55.51,29.25) ; C42.2 v1(32.79,28.75) ; C61.2 v1(47.75,49) ; Q2.2 v1(40.41,26.02) ; U4.15 v1(60,24.63) ; J10.2 v1(41.72,46.4) ; J10.2 40.06,45.72 ; J10.2 38.77,46.4 ; C50.2 v1(67.23,14) ; C8.2 v1(13,42.26) ; U7.12 v1(50.83,43.75) ; C7.2 v1(12,37.23) ; U6.1 43.95,21.45 ; U6.1 43.37,20.22 ; U6.1 v1(43.37,22.93) ; U6.1 42.79,21.45 ; C21.2 v1(48.75,13.99) ; C55.2 v1(80.77,8.75) ; v1(13,27.99) C19.2 13.55,28.74 13.83,28.46 U5.3 ; U2.19 27.75,28 v1(28.25,27.5) ; U6.8 v1(33.63,22.93) ; U11.2 v1(71.13,17) ; C60.2 v1(30.25,32) ; U8.12 v1(59.33,25.5) ; C52.2 v1(63.26,21.5) ; R37.2 v1(32.49,32.75) ; U6.32 v1(34.87,1.07) ; U6.36 v1(39.88,1.07) ; Q3.2 v1(30.58,26.02) ; U8.9 v1(57.5,22.92) ; C59.2 v1(64.75,9.75) ; J4.5 v1(8.07,23.75) ; C22.2 v1(51,13.99) ; 39.98,20.22 U6.3 ; U6.3 v1(39.98,22.93) ; U6.3 40.56,21.45 ; U8.15 v1(59.33,27) ; v1(52.5,15.29) 52.86,15.65 J6.1 v1(55.86,15.65) ; U6.4 v1(38.62,22.93) ; C56.2 v1(80.51,10.5) ; U7.10 v1(50.83,41.55) ; V16.2 v1(84.47,35.5) ; V17.2 v1(11,17) ; J10.1 v1(41.72,49.1) ; J10.1 40.06,49.79 ; J10.1 38.77,49.1 ; C17.2 v1(71.51,29) ; U4.8 v1(69.16,28.53) ; C39.2 v1(32.5,49.76) ; U1.47 v1(24.97,46.75) ; U4.10 v1(60.34,27.88) ; C14.2 v1(63.29,22.73) ; C5.2 v1(24.75,34) ; C47.2 v1(49.5,49.52) ; U7.13 v1(35.25,43.75) ; C4.2 v1(30.26,38.25) ; U7.24 v1(35.67,29.75) ; Q1.2 v1(40.84,23.98) ; SW1.1 16.57,18.75 16.3,19.02 v1(16.3,20.32) ; C41.2 v1(32.49,31.25) ; C6.2 v1(24.26,35.5) ; U3.1 v1(12.5,21.75) ; R41.1 v1(62.75,11) ; U6.13 v1(27.38,22.93) ; U6.37 v1(41.12,1.07) ; C51.2 v1(63.78,20) ; R39.1 v1(70.01,19.75) ; C57.2 v1(74,12.75) ; U8.8 v1(56,22.92) ; V15.2 v1(84.47,34) ; C44.2 v1(48.69,24.51) ; v1(72.5,26.25) 72.5,25.72 72.29,25.5 C15.2 ; R21.2 R19.2 v1(21.25,33.51) ; C18.1 v1(16.75,34.26) ; U1.4 v1(16.25,45.75) ; v1(52.5,18.5) 52.65,18.35 J6.2 v1(55.86,18.35) ; R36.2 v1(52.51,30.13) ; FB1.2 v1(8.52,18) ; C45.2 v1(46.91,24.37) ; C43.2 v1(56,22.03) ; C10.2 v1(28.26,47.01) ; V8.2 v1(34,49.84) ; U2.10 v1(22.92,31.25)
  TOP w0.254: 47.25,43.75 47.25,43.75 U7.12 ; 47.75,41.5 47.8,41.55 U7.10 ; D1.2 v1(74.24,1.76) ; D1.2 v1(74.24,4.74) ; D1.2 v1(76.25,3.25)
  TOP w0.508: U10.2 v1(49.62,21)
  GND w0.203: J3.8 89.25,20.1 ; J3.8 90,19.35 ; J3.8 89.25,18.6 ; J3.8 88.5,19.35 ; J3.7 89.25,22.1 ; J3.7 89.25,20.6 ; J3.7 88.5,21.35 ; J3.7 90,21.35 ; J3.9 89.25,18.1 ; J3.9 89.25,16.6 ; J3.9 90,17.35 ; J3.9 88.5,17.35 ; J11.3 88.25,11.3 ; J11.3 88.25,9.8 ; J11.3 87.5,10.55 ; J11.3 89,10.55 ; J1.6 16.01,2.25 ; J1.6 15.26,3 ; J1.6 15.26,1.5 ; J1.6 14.51,2.25 ; 3.15,34.25 J5.4 ; J5.4 2.15,35.25 ; J5.4 4.15,35.25 ; J5.4 3.15,36.25 ; 86.25,9.8 J11.2 ; J11.2 86.25,11.3 ; J11.2 85.5,10.55 ; J11.2 87,10.55
  BOTTOM w0.203: V12.2 v1(20.1,6.25) ; v1(24.05,22.93) R48.2 C62.2 25.19,21.04 24.8,20.65 D25.2 ; D23.2 v1(37.89,18.8) ; C24.1 v1(37.26,10.5) ; C34.2 v1(24.76,13.5) ; D24.2 v1(26.95,14.46) ; C26.1 v1(37.26,9) ; J9.4 v1(38.44,49.65) ; C12.2 v1(15.5,49.76) ; C23.1 v1(30.24,10.5) ; J8.1 v1(25.53,4.19) ; C63.1 v1(39.03,18.29) ; D22.2 v1(28.89,23.23) ; V11.2 v1(25.34,7.25) ; C64.1 v1(21.25,17.27) ; J7.1 v1(36.9,4.19) ; V13.2 v1(30.41,7.5) ; J7.4 v1(30.6,4.19) ; V14.2 v1(37.09,7.5) ; C37.2 v1(24.76,8.75) ; C33.2 v1(19.99,13.5) ; C25.1 v1(30.24,9) ; J9.3 v1(37.37,45.49) ; C36.2 v1(19.99,12.25) ; J8.4 v1(19.23,4.19) ; U13.1 v1(34.84,19.81) ; C65.1 v1(21.25,18.54) ; C35.2 v1(24.76,12.25) ; C11.2 v1(14,50.02) ; C38.2 v1(19.99,8.75)
  vias: v1(29.89,18.92) v1(29.89,16.76) v1(30.91,17.91) v1(31.92,18.92) v1(32.05,16.76) v1(38.5,47.75) v1(40.5,19.75) v1(40.5,18.25) v1(41.5,16.5) v1(42,45) v1(42.75,43.5) v1(42.75,19.75) v1(43,18.75) v1(43.25,49.25) v1(43.25,42.5) v1(43.25,15.75) v1(44,18.25) v1(44.5,49.25) v1(44.5,46.25) v1(44.75,45) v1(44.75,41.75) v1(45.25,43.75) v1(45.5,14.5) v1(46,46.25) v1(46.25,41.5) v1(46.25,18) v1(46.5,45) v1(47,43.75) v1(47.5,41.5) v1(48,18.25) v1(49,45.25) v1(49,18.25) v1(50,18.25) v1(50,14) v1(50.25,3.25) v1(50.25,2.25) v1(50.25,1.25) v1(50.5,45.25) v1(51.25,18.5) v1(52.25,14) v1(54.5,1.25) v1(55,2.75) v1(55,1.75) v1(55.75,1.25) v1(56,17) v1(57,1.25) v1(58.25,1.25) v1(71.5,11) v1(71.5,9.75) v1(71.5,8.75) v1(71.5,7.25) v1(72,20.75) v1(72.75,11) v1(72.75,9.75) v1(72.75,8.75) v1(72.75,7.25) v1(73.27,20.75) v1(74.54,20.75) v1(75.81,20.75) v1(77.08,20.75) v1(78.35,20.75) v2(25,31) v2(25,30) v2(26,31) v2(26,30) v2(27,31) v2(27,30) v2(56.25,26.25) v2(56.25,25.25) v2(57.25,26.25) v2(57.25,25.25)
VCC_2V8: length 19.7
  TOP w0.254: V5.1 18,23.5 18.25,23.25 20.51,23.25 R24.2 22.15,24.24 22.41,24.5 V6.2 ; V6.2 23.21,23.86 23.44,23.62 25.45,23.62 v1(25.83,23.24) 26.12,22.94 U6.14 ; V6.2 V7.2
  BOTTOM w0.254: C62.1 26.21,20.91 27.3,19.81 U13.8 ; C62.1 26.21,22.86 v1(25.83,23.24) ; C62.1 D22.1
VCC_3V3: length 59.9
  TOP w0.254: C14.1 v1(60.76,22.73) ; U10.5 54.23,21 54.41,20.82 54.41,20.08 v1(54.38,20.05) ; v1(58.01,29.25) C40.1 57.26,28.68 57.5,28.44 U8.16 ; U1.48 v1(27.03,47.25) 27.24,47.46 C10.1 ; C7.1 v1(12,40.27) C8.1 ; U2.20 v1(29.23,29.75) 29.48,29.99 C60.1 ; C46.1 v1(51,46.74) ; V2.2 V3.2 ; V3.2 v1(34.02,44) ; V3.2 V4.2 ; U5.2 13.6,29.73 13.57,29.76 C19.1 v1(13,30.51) ; v1(22.75,39) 23,38.75 U1.30 ; C5.1 v1(22.29,32.75) ; 55.25,48.22 U9.8 55.25,48.94 55.04,49.15 v1(53.64,49.15) ; 55.25,48.22 v1(55.25,46.82) ; 55.25,48.22 54.66,47.62 v1(53.64,47.62) ; 61.39,20.83 64.43,20.83 64.82,20.45 64.82,20.07 65.13,19.75 R38.1 ; R14.2 v1(8.51,32.75) ; C47.1 v1(49.5,46.48) ; U4.16 v1(60.34,23.98) ; C6.1 v1(21.62,35.5) ; R29.2 v1(31.25,49.76) ; U1.3 15.77,46.25 v1(15.94,46.42) ; C9.1 v1(29.75,46.73) ; U2.1 v1(29.23,31.25) ; R16.1 v1(14.75,33.51) ; U1.13 13.84,41.25 v1(13.34,40.75) U1.14 ; R15.2 v1(2.49,32.75)
  TOP w0.508: U10.4 v1(54.38,20.05) 54.64,19.79 C43.1 59.71,19.79 v1(60,19.5)
  VCC w0.254: 10.77,34.25 J5.1 ; J5.1 10.77,36.25 ; J5.1 11.77,35.25 ; J5.1 9.77,35.25
  BOTTOM w0.254: C12.1 v1(16.5,47.99) ; v1(15.94,46.42) 14.72,46.42 14,47.13 C11.1
  vias: v1(60,20.75) v1(60,18.25)
VCC_4V: length 11.9
  TOP w0.254: U6.38 42.37,4.19 v1(42.43,4.25) ; 61.25,9.25 61.25,11.75 61.75,12.25 R40.2 ; 47,11 47.04,11.04 C32.2 47.04,13.88 47,13.92 R28.2 ; U6.39 v1(43.63,4.25)
  vias: v1(42.75,8.75) v1(42.75,7) v1(42.75,5.25) v1(44,10.5) v1(44,8.75) v1(44,7) v1(44,5.25) v1(50.25,10.75) v1(50.25,9) v1(54.75,9.5) v1(55.25,8.25) v1(55.25,6.25) v1(57.25,7.25)
VCC_5V: length 3.9
  TOP w0.254: V1.1 81.5,13 81.5,13 ; C50.1 v1(70.27,14) ; U11.1 v1(71.13,16.05) ; U11.3 v1(71.13,17.95)
VCC_GPS_3V3: length 10.7
  TOP w0.254: C41.1 35.27,31.25 v1(35.67,30.85) U7.23 ; v1(34.5,28.75) 34.21,29.04 C42.1
  TOP w0.508: C44.1 47.8,22.28 ; C44.1 49.01,21.95 U10.1 ; C44.1 v1(48.69,21.46) ; 47.8,22.28 47.24,22.28 C45.1 v1(46.91,21.59) ; 47.8,22.28 v1(47.8,21.59)
VCC_IN: length 14.4
  TOP w0.254: F1.1 85.41,16 ; F1.1 84.47,17.45 ; F1.1 84.47,14.55 ; J3.10 87.25,18.16 ; J3.10 86.44,17.35 ; J3.10 87.25,16.54 ; J11.1 85.06,10.55 ; J11.1 84.25,11.36 ; J11.1 84.25,9.74 ; J11.1 83.44,10.55 ; J3.12 87.25,22.16 ; J3.12 87.25,20.54 ; J3.12 86.44,21.35 ; 86.44,19.35 J3.11 ; J3.11 87.25,20.16 ; J3.11 87.25,18.54
BT_ASSEMBLY: length 6.5
  TOP w0.152: R12.1 31,40 30.75,40.25 29.75,40.25 28.25,41.75 27.2,41.75 27.2,41.75 U1.37
EAR_N: length 5.3
  BOTTOM w0.152: L3.2 21.75,9.28 21.76,9.27 C38.1 21.76,8.03 21.4,7.67 V12.1 21.4,6.83 21.75,6.48 J8.3
EAR_P: length 5.3
  BOTTOM w0.152: L2.2 23,9.28 22.99,9.27 C37.1 22.99,8.03 23.35,7.67 V11.1 23.35,6.83 23,6.48 J8.2
GPS_ASSEMBLY: length 6.8
  TOP w0.152: U1.36 28,41.25 29.5,39.75 30.5,39.75 31,39.25 31.24,39.25 R11.1
GPS_PWR_EN: length 45.4
  TOP w0.152: U1.42 v1(24.25,44.25) ; v1(54.66,23.11) 54.66,22.1 54.5,21.95 U10.6 ; v1(46.75,25.75) v1(43.75,28.75)
  BOTTOM w0.152: v1(46.75,25.75) 50.11,25.75 52.75,23.11 v1(54.66,23.11) ; v1(24.25,44.25) 24.61,43.89 30.86,43.89 37.8,36.96 39.16,36.96 43.75,32.37 v1(43.75,28.75)
GPS_RXD: length 3.9
  TOP w0.152: U8.2 54.25,27 53.75,27.5 52.51,27.5 52.26,27.25 R34.2
GPS_TIMEPULSE: length 31.7
  TOP w0.152: v1(24.25,43.25) 24.75,43.75 U1.41 ; v1(39.03,34.67) 41.83,34.67 44.55,31.95 U7.3
  BOTTOM w0.152: v1(39.03,34.67) 37.08,34.67 30.5,41.25 29,41.25 27,43.25 v1(24.25,43.25)
GPS_TXD: length 3.7
  TOP w0.152: R35.2 52.5,25.75 52.75,25.5 54.4,25.5 54.4,25.5 U8.5
GPS_WAKE_UP: length 27.6
  TOP w0.152: v1(39.03,36.07) 41.44,36.07 44.45,33.05 U7.4 ; U1.40 v1(27.75,43.25)
  BOTTOM w0.152: v1(39.03,36.07) 37.68,36.07 30.5,43.25 v1(27.75,43.25)
GPS_WIFI_SEL: length 37.8
  TOP w0.152: U8.1 56,28.01 55.51,28.5 47.87,28.5 v1(45.26,31.11) ; v1(27.5,44.5) 27.25,44.5 27,44.75 U1.43
  BOTTOM w0.152: v1(45.26,31.11) 45.26,31.62 39.16,37.72 38.28,37.72 31.5,44.5 v1(27.5,44.5)
GSM_ASSEMBLY: length 7.7
  TOP w0.152: R10.1 31.03,37.5 30.77,37.77 30.77,38.74 30.25,39.25 29.5,39.25 28,40.75 U1.35
GSM_ON_IND: length 14.4
  TOP w0.152: U1.19 17.5,36.5 v1(18.71,35.3) ; R24.1 v1(21.5,26.25)
  BOTTOM w0.152: v1(18.71,35.3) 18.86,35.14 18.86,34.36 18.5,34 18.5,29.25 v1(21.5,26.25)
GSM_PWR_EN: length 69.3
  TOP w0.152: v1(76.75,9.89) 76.25,9.89 76.24,9.89 U12.3 ; U1.38 24.75,42.25 v1(24.5,42.5) ; v1(45.13,26.13) v1(42.25,29)
  BOTTOM w0.152: v1(76.75,9.89) 75.76,9.89 72.64,13 63.63,13 55.55,21.08 53.89,21.08 49.83,25.15 46.11,25.15 v1(45.13,26.13) ; v1(24.5,42.5) 26.75,42.5 28.75,40.5 30.24,40.5 41.74,29 v1(42.25,29)
GSM_PWRKEY: length 26.7
  TOP w0.152: v1(29.5,42) 29.14,42.36 27.42,42.36 27.03,42.75 U1.39 ; v1(41.19,30.86) 41.19,28.56 41.88,27.87 Q1.1
  BOTTOM w0.152: v1(29.5,42) 30.75,42 37.32,35.43 39.16,35.43 41.19,33.4 v1(41.19,30.86)
GSM_RESETB: length 13.7
  TOP w0.152: R25.1 v1(20,26.16) ; U1.18 17,36.01 18,35.01 v1(18,34.92)
  BOTTOM w0.152: v1(18,34.92) 18,29.04 20,27.04 v1(20,26.16)
HOST_RXD: length 18.6
  TOP w0.152: R7.2 v1(81,31) 84.75,31 85.25,30.5 85.25,29.75 85.66,29.35 J3.16 ; v1(81,33.75) 81,35.25 81.25,35.5 V16.1
  BOTTOM w0.152: v1(81,33.75) v1(81,31)
HOST_TXD: length 17.6
  TOP w0.152: R6.2 v1(82.25,29.75) 84,29.75 84.5,29.25 84.5,28.25 85.4,27.35 J3.15 ; v1(82.25,32.25) 82.25,33.01 82.35,33.11 V15.1
  BOTTOM w0.152: v1(82.25,29.75) v1(82.25,32.25)
J_LED1: length 2.3
  TOP w0.152: J1.1 15,12.51 R4.2
J_LED2: length 5.4
  TOP w0.152: R3.2 13.75,10.92 14.42,10.25 J1.2
J_LED3: length 6.7
  TOP w0.152: J1.3 16.25,9.24 R2.2
J_LED4: length 9.2
  TOP w0.152: R1.2 17.5,8.49 J1.4
J_PWR_OFF: length 12.9
  TOP w0.152: V17.1 11.87,14.6 11.98,14.49 R5.1 12.5,10.75 14,9.25 14,5.51 J1.5
LED1: length 15.2
  TOP w0.152: U2.8 v1(24.75,33.25) ; U1.21 18.5,39.5 19.01,40.01 20.74,40.01 v1(21.25,39.5)
  BOTTOM w0.152: v1(24.75,33.25) 24.39,33.61 23.14,33.61 22,34.75 21.49,34.75 20.89,35.35 20.89,39.14 v1(21.25,39.5)
LED2: length 9.2
  TOP w0.152: v1(20.49,34.54) 20.49,35.49 21.49,36.49 21.49,36.96 21.5,36.97 U1.27 ; v1(23.25,32.75) 23.5,33 24.13,33 24.25,32.88 U2.9
  BOTTOM w0.152: v1(23.25,32.75) 21.86,34.14 21.4,34.14 21,34.54 v1(20.49,34.54)
LED3: length 8
  TOP w0.152: v1(25.26,34.75) 25.26,33.04 25.25,33.03 U2.7 ; U1.28 v1(22,36.5)
  BOTTOM w0.152: v1(25.26,34.75) 23.75,34.75 v1(22,36.5)
LED4: length 8.7
  TOP w0.152: v1(23.25,36.5) 22.95,36.5 22.5,36.95 U1.29 ; v1(26.25,33.25) 26,33.25 25.75,33 U2.6
  BOTTOM w0.152: v1(23.25,36.5) 24.75,36.5 26.25,35 v1(26.25,33.25)
LED5: length 4.4
  TOP w0.152: R18.2 28.47,43.25 28.25,43.47 28.25,44.5 27.5,45.25 U1.44
LED6: length 3.5
  TOP w0.152: U1.45 27.74,45.75 R20.1
LED7: length 3.2
  TOP w0.152: R22.1 28.49,46.25 U1.46
M_RST: length 19.3
  TOP w0.152: SW1.2 v1(12.2,20.2) ; C18.2 R16.2 13.76,32.49 13.5,32.23 v1(13.5,31.5) 14,31 U5.1
  BOTTOM w0.152: v1(12.2,20.2) 13.5,21.5 13.5,27.77 13.51,27.78 13.51,30.72 13.5,30.73 v1(13.5,31.5)
MCU_RESET: length 21.6
  TOP w0.152: v1(19.25,31.74) R21.1 ; v1(18.75,41) 23.75,41 24.5,40.25 24.8,40.25 24.8,40.25 U1.34 ; U5.7 19.52,29.73 v1(19.25,30)
  BOTTOM w0.152: v1(18.75,41) 18.39,40.64 18.39,37.36 19.25,36.5 v1(19.25,31.74) v1(19.25,30)
MIC_N: length 20.5
  TOP w0.152: U6.10 31.13,18.83 33.24,16.72 v1(33.24,12.5)
  BOTTOM w0.152: C25.2 C28.1 ; C28.1 C27.1 ; C28.1 33.24,8.3 32.44,7.5 ; 32.44,7.5 33.13,6.81 J7.3 ; 32.44,7.5 V13.1 ; C27.1 v1(33.24,12.5) ; C27.1 C23.2
MIC_P: length 20.4
  TOP w0.152: U6.9 32.37,19.36 34.26,17.48 v1(34.26,12.5)
  BOTTOM w0.152: C27.2 v1(34.26,12.5) ; C27.2 C24.2 ; C27.2 C28.2 ; C28.2 C26.2 ; C28.2 34.26,8.3 35.06,7.5 ; 35.06,7.5 V14.1 ; 35.06,7.5 34.37,6.81 J7.2
NET_LIGHT: length 5
  TOP w0.152: U6.6 36.12,22.88 36,23 34.75,23 33.75,24 R33.2
PTT: length 18.9
  TOP w0.152: U1.51 23,48.5 v1(23.5,48) ; v1(36.12,45.49) 36.12,46.14 34.42,47.85 V8.1 33.58,47.85 33.44,47.99 C39.1 R29.1 v1(31.25,47)
  BOTTOM w0.152: v1(31.25,47) 31.25,48 31,48.25 23.75,48.25 v1(23.5,48) ; J9.2 v1(36.12,45.49)
PWR_OFF: length 24.7
  TOP w0.152: v1(17,35) 16.5,35.5 U1.17 ; R5.2 v1(12.5,16.39)
  BOTTOM w0.152: v1(12.5,16.39) 12.5,19.31 17.49,24.3 17.49,34.51 v1(17,35)
PWR_STATUS: length 5
  TOP w0.152: R32.2 35,24.22 35.47,23.75 36.75,23.75 37.38,23.13 U6.5
PWRKEY_N: length 27.5
  TOP w0.152: R28.1 v1(45,15.51) 38.62,9.13 U6.35 ; v1(44.75,24) 44.75,24.37 Q1.3
  BOTTOM w0.152: v1(45,15.51) 45,23.24 44.75,23.49 v1(44.75,24)
R_LED1: length 17.4
  TOP w0.152: v1(24.05,27.3) 24.05,27.92 24.25,28.12 U2.12 ; R4.1 v1(15,16.39)
  BOTTOM w0.152: v1(24.05,27.3) 24.05,26.42 15,17.37 v1(15,16.39)
R_LED2: length 19.5
  TOP w0.152: R3.1 v1(13.75,16.39) ; U2.11 v1(22.77,29.75)
  BOTTOM w0.152: v1(13.75,16.39) 13.75,16.89 23.13,26.27 23.13,29.39 v1(22.77,29.75)
R_LED3: length 17
  TOP w0.152: R2.1 v1(16.25,16.39) ; U2.13 v1(24.75,27.75)
  BOTTOM w0.152: v1(16.25,16.39) 16.25,17.73 24.75,26.23 v1(24.75,27.75)
R_LED4: length 16.9
  TOP w0.152: R1.1 v1(17.5,16.38) ; U2.14 25.25,28.01 25.45,27.81 v1(25.45,27.3)
  BOTTOM w0.152: v1(25.45,27.3) 25.45,26.16 17.5,18.22 v1(17.5,16.38)
RXD_RS232: length 56.3
  TOP w0.152: J11.4 90.25,9.5 90.75,9 92.75,9 93.5,9.75 93.5,12 90.75,14.75 90.75,26 90.25,26.5 88.41,26.5 J3.14 ; U4.13 63.83,25.93 65,24.75 65,23 65.39,22.61 68.89,22.61 v1(69.25,22.25)
  BOTTOM w0.152: J3.14 83.66,21.75 69.75,21.75 v1(69.25,22.25)
SIM_C2: length 3.4
  BOTTOM w0.152: D25.1 26.1,19.08 26.08,19.06 R45.1 U13.7
SIM_C3: length 3.4
  BOTTOM w0.152: U13.6 R47.1 D24.1
SIM_C7: length 3.4
  BOTTOM w0.152: D23.1 35.72,18.38 35.61,18.26 R46.2 U13.3
SIM_CLK: length 20.8
  TOP w0.152: U6.29 31.13,3.8 31.54,4.22 31.54,10.79 25.95,16.38 v1(24.18,16.38)
  BOTTOM w0.152: 24.18,17.27 25.06,17.27 ; 24.18,17.27 v1(24.18,16.38) ; 24.18,17.27 23.29,17.27
SIM_DATA: length 17.9
  TOP w0.152: U6.30 32.37,8.2 36.62,12.45 v1(36.62,16.26)
  BOTTOM w0.152: C63.2 R46.1 v1(36.62,16.26)
SIM_RST: length 20.7
  TOP w0.152: U6.28 29.87,3.8 29.13,4.55 29.13,10.41 23.54,16 23.54,17.27 v1(24.18,17.91)
  BOTTOM w0.152: 24.18,18.54 v1(24.18,17.91) ; 24.18,18.54 25.06,18.54 ; 24.18,18.54 23.29,18.54
SWD_CLK: length 20.6
  TOP w0.152: U1.22 19,37 v1(18.5,36.5) ; J5.3 5.69,33.44 5,32.75 R15.1
  BOTTOM w0.152: v1(18.5,36.5) 17.5,36.5 16.01,35.01 13.51,35.01 12,33.5 6,33.5 5.69,33.81 J5.3
SWD_DIO: length 24.9
  TOP w0.152: J5.2 6.74,33.76 R14.1 ; v1(17.75,39.25) 18.11,39.61 18.11,39.87 18.53,40.29 21.46,40.29 21.76,39.99 21.76,39.04 21.46,38.74 20.65,38.74 20.5,38.59 U1.25
  BOTTOM w0.152: J5.2 8.23,34.24 8.47,34 11.75,34 13.29,35.54 15.79,35.54 17.39,37.14 17.39,38.89 v1(17.75,39.25)
TXD_RS232: length 46.9
  TOP w0.152: J11.5 92.25,12 90.25,14 90.25,24 90,24.25 88.16,24.25 J3.13 ; U4.14 63.48,25.28 64.5,24.25 64.5,22.75 65.25,22 68.25,22 v1(68.75,21.5)
  BOTTOM w0.152: v1(68.75,21.5) 69.26,21.5 69.5,21.26 85.16,21.26 J3.13
UART0_RX: length 49
  TOP w0.152: U8.7 54.25,24.5 54,24.25 v1(53,24.25) ; U1.23 19.5,38.76 v1(19.5,39.5)
  BOTTOM w0.152: v1(53,24.25) 50,27.25 30.33,27.25 28.66,28.92 28.66,35.67 23.58,40.75 20.75,40.75 v1(19.5,39.5)
UART0_TX: length 47.1
  TOP w0.152: U8.4 53,26 52.5,26.5 v1(49,26.5) ; U1.24 20,38.74 20.25,38.99 v1(20.25,39.5)
  BOTTOM w0.152: v1(49,26.5) 48.64,26.86 30.14,26.86 28.25,28.75 28.25,35.5 23.5,40.25 21,40.25 v1(20.25,39.5)
UART1_RX: length 82.4
  TOP w0.152: U1.2 15.55,46.75 15.8,47 17.25,47 v1(21.25,43) ; R6.1 v1(73.62,29.75) ; v1(59,30.4) 62.52,30.4 63.9,29.02 63.9,27.23 63.25,26.58 U4.12
  BOTTOM w0.152: v1(73.62,29.75) 72.97,30.4 v1(59,30.4) 58.4,30.4 56.74,28.74 55.49,28.74 54.5,27.75 32,27.75 31.25,28.5 31.25,33.75 22,43 v1(21.25,43)
UART1_TX: length 82
  TOP w0.152: v1(57.5,30.5) 58.25,29.75 62.25,29.75 63.25,28.75 63.25,27.5 62.98,27.23 U4.11 ; v1(22,43.64) 18.16,47.48 15.54,47.48 15.3,47.25 U1.1 ; R7.1 v1(73.62,31)
  BOTTOM w0.152: v1(73.62,31) 58,31 v1(57.5,30.5) 57.01,30.01 55.26,30.01 53.41,28.16 32.17,28.16 31.66,28.67 31.66,34.1 22.47,43.28 22.36,43.28 v1(22,43.64)
UART2_RX: length 18.9
  TOP w0.152: v1(14.75,36.25) 14,35.5 v1(14,34.25) ; R26.1 v1(15,26.25) ; v1(16,41.25) 15.5,41.75 U1.12
  BOTTOM w0.152: v1(15,26.25) 14.01,27.24 14.01,31.71 14,31.72 v1(14,34.25) ; v1(14.75,36.25) 14.75,38.52 16,39.77 v1(16,41.25)
UART2_TX: length 19.9
  TOP w0.152: v1(15.5,37) v1(15.5,34.5) ; U1.11 v1(16.25,42.25) ; R27.1 v1(16.5,26.25)
  BOTTOM w0.152: v1(15.5,34.5) 15.5,27.25 v1(16.5,26.25) ; v1(15.5,37) 15.5,38.54 16.75,39.79 16.75,41.75 v1(16.25,42.25)
USB_DM: length 18.3
  TOP w0.127: R8.1 10.65,32.73 10.78,32.86 10.98,32.86 11.11,32.98 11.11,33.3 11.43,33.62 12.12,33.62 12.75,34.25 12.75,36.25 17.5,41 17.5,43.75 16.42,44.83 15.38,44.83 15.3,44.75 U1.6
USB_DP: length 18.9
  TOP w0.127: U1.5 15.3,45.25 15.38,45.17 16.55,45.17 17.83,43.89 17.83,40.87 13.08,36.11 13.08,34.12 12.25,33.29 11.57,33.29 11.44,33.16 11.44,32.98 11.57,32.86 11.77,32.86 11.9,32.73 R9.1
WD_IN: length 26.3
  TOP w0.152: v1(19.75,47) 19.75,48.1 19.9,48.25 20.31,48.25 20.5,48.45 U1.56 ; R19.1 20.51,32.5 21,32.5 v1(21.5,32)
  TOP w0.254: U5.6 v1(22.5,28.46)
  BOTTOM w0.152: v1(19.75,47) 19.75,40.75 18.79,39.79 18.79,38.21 19.74,37.26 19.74,33.26 20.5,32.5 21,32.5 v1(21.5,32) 21.5,29.46 v1(22.5,28.46)
WDO_B: length 5.6
  TOP w0.152: U1.26 21,36.83 18.46,34.29 18.26,34.29 18,34.03 R17.2
WIFI_ASSEMBLY: length 4.9
  TOP w0.152: R13.1 26,49.25 24.74,47.99 24.26,47.99 24,48.25 U1.49
WIFI_EN: length 55.1
  TOP w0.152: U9.3 v1(65.25,46.5) ; U1.54 v1(21.5,47.75)
  BOTTOM w0.152: v1(21.5,47.75) 21.5,47.24 23.24,45.5 33.81,45.5 33.81,45.51 34.5,45.51 35.75,44.26 40,44.26 46.25,38 56.75,38 v1(65.25,46.5)
WIFI_RST: length 61
  TOP w0.152: U1.55 21,48.25 v1(20.5,47.75) ; U9.1 v1(69.25,46.51)
  BOTTOM w0.152: v1(69.25,46.51) 60.12,37.38 45.88,37.38 40.25,43 34,43 31.99,45.01 22.49,45.01 20.5,47 v1(20.5,47.75)
WIFI_RXD: length 19.1
  TOP w0.152: U9.21 67.25,30.75 66.75,30.25 65.75,30.25 v1(64.75,29.25) ; U8.3 54.26,26.5 54.01,26.75 v1(53.5,26.75)
  BOTTOM w0.152: v1(53.5,26.75) 55,26.75 56,27.75 58,27.75 59.5,29.25 v1(64.75,29.25)
WIFI_TXD: length 21.2
  TOP w0.152: v1(65.25,28.5) 66.25,29.5 68.25,29.5 69.25,30.5 U9.22 ; U8.6 54.01,25 v1(53.88,24.87)
  BOTTOM w0.152: v1(53.88,24.87) 56.26,27.25 58.5,27.25 59.75,28.5 v1(65.25,28.5)
WIFI_WAKEUP: length 51.7
  TOP w0.152: U1.53 22,48.25 v1(22.5,47.75) ; U9.4 v1(63.25,46.5)
  BOTTOM w0.152: v1(63.25,46.5) 55.25,38.5 46.53,38.5 40.28,44.75 36,44.75 34.75,46 24,46 22.5,47.5 v1(22.5,47.75)
N01096: length 5.6
  TOP w0.152: G1.1 27.8,34.9 26.94,35.76 C3.1 25.51,36.5 24.45,36.5 24,36.95 U1.32
N01100: length 6.3
  TOP w0.152: U1.33 27.99,39.75 28.49,39.25 C4.1 28.49,37.76 28.75,37.5 29.1,37.5 30,36.6 G1.3
N06381: length 2.7
  TOP w0.152: C13.2 69.97,24.25 69.7,23.98 U4.1
N06389: length 9.1
  TOP w0.152: C13.1 71.51,23.73 71.03,23.25 66.75,23.25 66.25,23.75 66.25,24.75 66.78,25.28 U4.3
N06450: length 2.6
  TOP w0.152: C16.1 69.67,26.75 69.5,26.58 U4.5
N06464: length 3.9
  TOP w0.152: C16.2 70.78,26.02 70.09,26.02 70.07,26 69,26 68.93,25.93 U4.4
N06635: length 2.9
  TOP w0.152: U4.6 68.98,27.23 69.75,28 C17.1
N06639: length 3.1
  TOP w0.152: C15.1 69.75,25.5 69.5,25.25 69.5,25 69.13,24.63 U4.2
N09232: length 13
  TOP w0.152: v1(18.46,22.48) 18.46,20.7 19.35,19.81 24.49,19.81 24.88,20.2 U6.15 ; R25.2 v1(19.01,24.24)
  BOTTOM w0.152: v1(18.46,22.48) 19.01,23.03 v1(19.01,24.24)
N09470: length 23.7
  TOP w0.152: U6.20 19.87,4.38 18.5,5.75 18.5,19.26 15,22.77 R26.2
N09480: length 25.9
  TOP w0.152: V5.2 17.85,25.25 17.5,25.25 17.25,25 17.25,24.47 17.02,24.24 R27.2 16.5,21.9 19,19.4 19,6.06 21.13,3.94 U6.21
N10748: length 9.7
  TOP w0.152: U6.2 41.67,18.83 arc(42.21,17.54) 43.5,17 C20.2
N10820: length 2.5
  TOP w0.152: C21.1 48.75,16.28 48.76,16.29 C20.1 R23.1
N10896: length 3
  TOP w0.152: C22.1 51,16.47 51.01,16.48 R23.2 J6.3 52.75,17
N14884: length 16.3
  TOP w0.152: v1(22.9,16.25) 22.9,18.03 23.67,18.8 28.62,18.8 29.87,20.05 U6.11
  BOTTOM w0.152: v1(22.9,16.25) C29.2 22.9,14.48 22.99,14.39 C34.1 C35.1 22.99,11.54 23,11.53 L2.1
N14898: length 16
  TOP w0.152: U6.12 28.63,19.82 28.11,19.3 23.41,19.3 21.88,17.77 v1(21.88,16.25)
  BOTTOM w0.152: L3.1 21.75,11.72 21.76,11.73 C36.1 C33.1 21.76,14.36 21.88,14.48 C29.1 v1(21.88,16.25)
N18352: length 5.8
  TOP w0.152: Q2.1 v1(38.27,23.98) ; R32.1 35.76,25.76 v1(36,26)
  BOTTOM w0.152: v1(38.27,23.98) 37.91,24.34 37.91,25.26 37.16,26 v1(36,26)
N18359: length 3.6
  TOP w0.152: Q3.1 32.43,23.98 32.75,24.3 32.75,25.61 32.9,25.76 R33.1
N18758: length 10.1
  TOP w0.152: R30.1 27.26,24.5 v1(28.25,24.5) ; Q2.3 v1(36,25)
  BOTTOM w0.152: v1(28.25,24.5) 28.75,25 v1(36,25)
N18762: length 2.4
  TOP w0.152: R31.1 27.78,25.75 27.78,25.75 28.53,25.75 29.28,25 Q3.3
N18890: length 1.7
  TOP w0.152: V7.1 25.74,26.25 R31.2
N18894: length 1.4
  TOP w0.152: V6.1 R30.2
N20713: length 12
  TOP w0.152: U7.11 45.6,42.65 arc(44.12,43.27) 43.5,44.75 43.5,46.19 43.49,46.2 L6.1 J10.3
N20956: length 8.8
  TOP w0.152: U7.7 50.65,36.35 51.49,35.51 R36.1
N20968: length 3.2
  TOP w0.152: U7.22 35.06,31.95 R37.1
N21119: length 16
  TOP w0.152: U7.21 41.7,33.05 47.5,27.25 R34.1
N21123: length 17.8
  TOP w0.152: R35.1 48,25.75 41.24,32.51 v1(39.03,32.51) ; U7.20 38.67,34.15 v1(39.03,33.78)
  BOTTOM w0.152: v1(39.03,32.51) v1(39.03,33.78)
N24334: length 4.3
  TOP w0.152: R17.1 18,31.25 18.25,31 U5.8
N33466: length 1.7
  TOP w0.152: R20.2 30.96,44.5 V3.1
N33798: length 1.4
  TOP w0.152: R22.2 30.71,45.75 V4.1
N36026: length 30.1
  TOP w0.508: v1(2.4,31.65) J4.9 J4.8 ; FB1.1 5.53,18 5.53,18 v1(3,18) 2.4,18.6 J4.7 J4.6
  BOTTOM w0.508: v1(3,18) 2.4,18.6 v1(2.4,31.65)
N36326: length 1.5
  TOP w0.152: L1.3 10.75,30.61 10.65,30.71 R8.2
N36338: length 1.6
  TOP w0.152: L1.2 11.75,30.56 11.9,30.71 R9.2
N37457: length 12
  TOP w0.127: L1.1 11.75,27.22 11.42,26.88 11.42,26.45 10.55,25.58 8.02,25.58 7.79,25.35 J4.3
  TOP w0.152: v1(12.5,27.25) 12.5,27.43 12.18,27.75 L1.1 ; v1(11.76,24.25) U3.2
  BOTTOM w0.152: v1(11.76,24.25) 11.76,24.49 12.5,25.23 v1(12.5,27.25)
N37463: length 11.6
  TOP w0.127: J4.2 7.79,26.15 8.02,25.91 10.41,25.91 11.08,26.59 11.08,26.88 10.75,27.22 L1.4
  TOP w0.152: L1.4 v1(9.75,27.75) ; U3.3 v1(9.74,24.24)
  BOTTOM w0.152: v1(9.75,27.75) 9.75,24.25 v1(9.74,24.24)
N55761: length 3.4
  TOP w0.152: U12.4 76.16,11.16 76.5,11.5 76.5,12.01 C57.1
N56569: length 3.4
  TOP w0.152: C49.1 76.76,5.76
  TOP w0.254: 76.75,5.75 76.76,5.76 76.76,7.09 76.51,7.35 75.99,7.35 U12.1
N56581: length 5.7
  TOP w0.254: C49.2 v1(75,5.75)
  BOTTOM w0.254: v1(75,5.75) v1(70,5.75)
N57170: length 7.4
  TOP w0.152: R40.1 R42.2 65.74,12.77 66.05,13.08 67.86,13.08 68.24,12.7 68.24,11.41 68.5,11.16 U12.5
N57275: length 1.2
  TOP w0.152: C58.2 R41.2
N57283: length 4.2
  TOP w0.152: U12.6 68.25,9.89 68.24,9.89 67.42,9.89 67.28,9.75 C59.1 66.76,10.27 C58.1
N62115: length 3.9
  TOP w0.152: R38.2 R39.2 68.24,19.23 68.25,19.22 68.25,18.1 68.1,17.95 U11.4
N16753958: length 13.6
  TOP w0.254: U7.9 v1(50.83,40.45) ; U7.8 v1(50.83,39.35) ; R44.2 v1(47.75,47.75)
  BOTTOM w0.254: v1(47.75,47.75) 47.75,43.53 v1(50.83,40.45) v1(50.83,39.35)
N16763366: length 2.3
  TOP w0.152: V2.1 30.27,42.25 30.01,42.51 R18.1
N16821872: length 5
  TOP w0.152: R43.2 54.76,29.77 55.09,30.1 56.26,30.1 57.25,31.09 U9.16
N16822669: length 2.5
  TOP w0.152: C61.1 R44.1 L6.2
N16857182: length 3.5
  TOP w0.152: U6.17 22.38,22.84 22.52,22.99 v1(23.03,22.99)
  BOTTOM w0.152: v1(23.03,22.99) 23.03,21.59

## Copper pours and planes (outline as drawn; the poured copper is in the pictures)
GND on TOP (solid shape): 79.25,21.25 79.25,18.75 78.75,18.25 72,18.25 71.5,18.75 71.5,21.25 72,21.75 78.75,21.75
GND on TOP (solid shape): 55,3.25 58.5,3.25 58.75,3 58.75,1 58.5,0.75 46.25,0.75 46,1 46,3.5 46.25,3.75 54.5,3.75
GND on TOP (solid shape): 73.45,6.3 74.75,5 75.5,5 76.75,3.75 76.75,2.5 75.5,1.25 73.5,1.25 72.5,2.25 72.5,4.25 71,5.75 71,7.75 70.5,8.25 68.75,8.25 68.5,8.5 68.5,8.75 68.75,9 70.5,9 71,9.5 71,12 73.45,12
GND on TOP: 38.5,46.75 38.5,45.75 43.25,41 51,41 51.25,41.25 51.25,45.5 51,45.75 49,45.75 48,46.75
GND on TOP: 38,50.25 38,48.75 45,48.75 45,50.25
GND on TOP: 39.5,22.75 39.5,17.25 41.5,15.25 44,15.25 44.75,16 47.5,16 47.5,18.25 47.25,18.5 45.25,18.5 44,19.75 44,22.75 43.75,23 39.75,23
GND on GND: 13.51,0.51 13.51,8.01 5.51,8.01 5.51,13.01 0.51,13.01 0.51,37.99 5.51,37.99 5.51,42.99 13.51,42.99 13.51,50.49 57.25,50.49 57.25,31.75 84,31.75 84,36.5 90.75,36.5 90.75,14.5 93.99,14.5 93.99,8.01 77.49,8.01 77.49,0.74 77.26,0.51 67.25,0.51 67.25,8.75 59.75,8.75 59.75,0.51
VCC_3V3 on TOP (solid shape): 61.75,23.13 61.75,19.07 62.02,18.8 63.42,18.8 63.42,14.48 60.75,14.48 59.61,15.62 59.61,22.35 60.5,23.24 61.64,23.24
VCC_3V3 on VCC: 13.75,1.25 13.75,8.5 11.5,8.5 11.5,13.75 1,13.75 1,37.25 11,37.25 11,42.75 13.75,42.75 13.75,50 56.75,50 56.75,31.25 89.75,31.25 89.75,22.5 71.5,22.5 67.5,18.5 67.5,14.5 66.5,13.5 38.5,13.5 38.5,1.25
VCC_4V on TOP (solid shape): 55.5,10.25 55.5,9.75 55.75,9.5 61.75,9.5 62.5,8.75 62.5,2.5 61.75,1.75 60,1.75 59.25,2.5 59.25,4.75 58.75,5.25 55.25,5.25 54.75,5.75 54.75,7.25 54.5,7.5 45.25,7.5 44.75,7 44.75,3.75 41.75,3.75 41.75,9 44,11.25 54.5,11.25
VCC_4V on VCC: 39.25,1.5 39.25,11.75 40,12.5 62.5,12.5 63.5,11.5 63.5,8.75 59.75,8.75 59.75,1.5
VCC_5V on TOP (solid shape): 81.75,18 81.75,13 81.5,12.75 79.5,12.75 78.75,12 78.75,8.5 78.5,8.25 74.25,8.25 74,8.5 74,8.75 74.25,9 76.75,9 77.25,9.5 77.25,12.75 76.5,13.5 69.25,13.5 69.25,16 69.5,16.25 79.75,16.25 80,16.5 80,18 80.25,18.25 81.5,18.25
